# Altium PCB radxa_nx5_io_board_v1.4.PcbDoc (part 6 of 6)
Units mil, origin at the board's own origin, x right, y up, seen from the top; angles counter-clockwise.
Board outline 3937.73 x 3112.19 mil, 6 copper layers (Top, GND02, 内层3, Power4, 内层 5, Bottom), stack 58.1 mil thick; 363 components, 344 nets, 1618 pads, 1594 vias.
Unrouted connection lines stored in the file: 899.
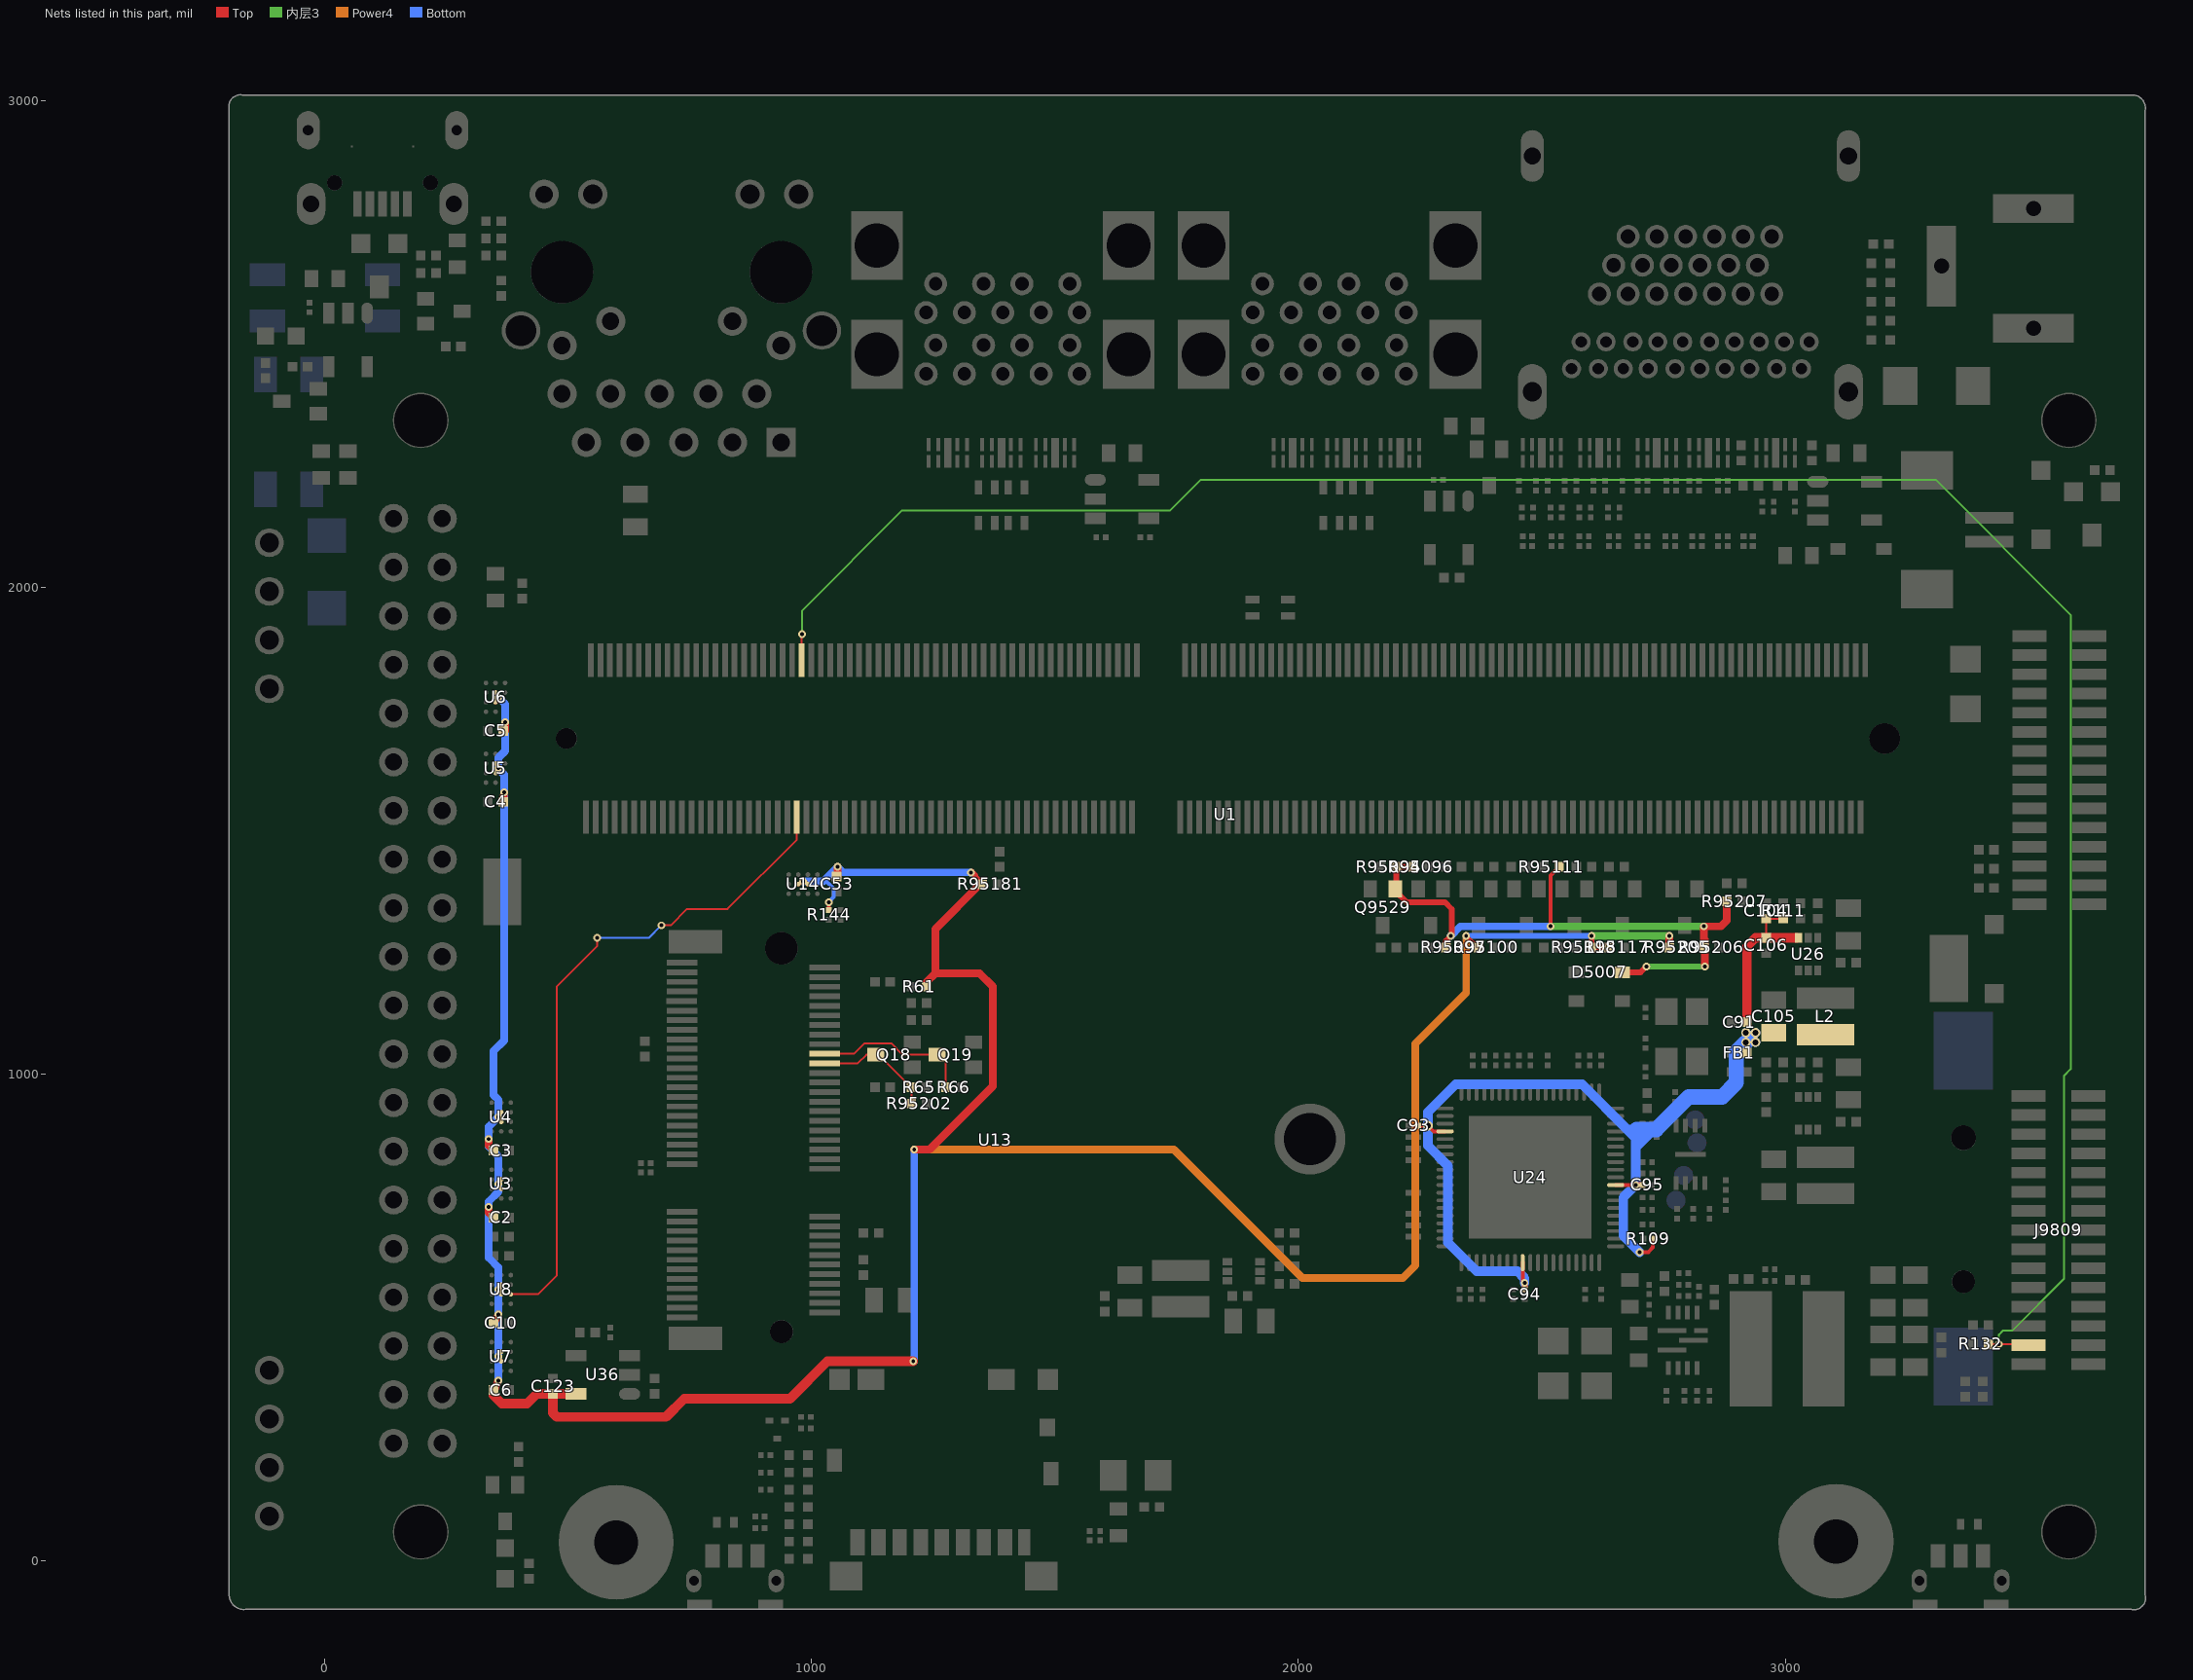
[diagram p9: the nets of this part, all layers, seen from the top]

## Via types
v1: diameter 15.75, hole 7.87, Top to Bottom, 1425 vias
v2: diameter 19.68, hole 11.81, Top to Bottom, 169 vias

## Nets (pads, with @x,y where several pads share a name; then routed paths per layer and width w, separated by ;. In a path a pad name is that pad's centre, name@x,y a point inside that pad or via, vN(x,y) a via of type N, cw(c..) or ccw(c..) an arc to the next point about the centre after c; other vN are vias at no path point) (continued)
VCC_1V2: C91.1 C93.1 C94.1 C95.1 C104.1 C105.1 C106.1 FB1.1 L2.2 R109.1 R111.1 U24.4 U24.28 U24.47 U26.6 | length 2460.5
  Top w3.94: C106.1@2960.63,1279.53 C104.1@2960.63,1318.9 R111.1@2996.06,1318.9
  Top w7.87: C93.1@2246.06,893.7 v2(2265.75,893.7) 2277.56,881.89 U24.4@2301.18,881.89 ; U24.28@2460.63,612.2 2460.63,574.8 v1(2464.57,570.87) ; U24.47@2651.57,771.65 v1(2692.91,771.65) ; v1(2700.79,633.86) 2718.5,633.86 2728.35,643.7 R109.1@2728.35,661.42 ; U26.6@3023.62,1279.53 U26.6@3027.56,1279.53
  Top w11.81: C94.1@2464.57,557.09 v1(2464.57,570.87) ; v1(2692.91,771.65) C95.1@2706.69,771.65
  Top w19.68: C91.1@2921.26,1106.3 2921.26,1261.81 2938.98,1279.53 C106.1@2960.63,1279.53 U26.6@3023.62,1279.53
  Bottom w19.68: v1(2464.57,570.87) 2464.57,580.17 2450.25,594.49 2366.14,594.49 2307.09,653.54 2307.09,811.02 2265.75,852.36 v2(2265.75,893.7) 2265.75,921.26 2322.83,978.35 2582.68,978.35 ; v1(2700.79,633.86) 2667.32,667.32 2667.32,746.06 v1(2692.91,771.65) 2692.91,868.11 ; 2730.32,885.83 2692.91,848.43 2692.91,868.11 ; v2(2919.29,1064.96) v2(2938.98,1084.65) ; v2(2919.29,1084.65) v2(2938.98,1064.96) ; 2582.68,978.35 2675.2,885.83 ; 2582.68,978.35 2692.91,868.11 ; 2675.2,885.83 2692.91,868.11 ; 2675.2,885.83 2694.88,885.83 2692.91,883.86 2692.91,868.11
  Bottom w31.5: 2694.88,885.83 2730.32,885.83 2734.76,885.83 2801.69,952.76 2870.5,952.76 2899.61,981.86 2899.61,1045.28 v2(2919.29,1064.96)
VCC_1V8: C2.2 C3.2 C4.2 C5.2 C6.2 C10.2 C53.2 C123.1 R61.2 R144.2 R95100.2 R95117.2 R95118.2 R95181.2 R95205.2 U3.B2 U3.C2 U4.B2 U4.C2 U5.B2 U5.C2 U6.B2 U6.C2 U7.B2 U7.C2 U8.B2 U8.C2 U14.B2 U14.C2 U36.5 | length 6949.2
  Top w7.87: U5.C2@350.39,1618.11 v1(356.3,1627.95) 356.52,1628.17 356.52,1631.67 U5.B2@350.39,1637.8 ; U6.C2@350.39,1763.78 v1(356.3,1773.62) 356.52,1773.84 356.52,1777.34 U6.B2@350.39,1783.46 ; U7.C2@362.2,409.45 v1(356.3,419.29) 356.08,419.51 356.08,423.01 U7.B2@362.2,429.13 ; U8.C2@362.2,547.24 356.08,553.37 356.08,556.87 v1(356.3,557.09) U8.B2@362.2,566.93 ; U3.C2@362.2,763.78 356.08,769.9 356.08,773.4 v1(356.3,773.62) U3.B2@362.2,783.46 ; U4.C2@362.2,901.57 356.08,907.7 356.08,911.2 v1(356.3,911.42) U4.B2@362.2,921.26 ; U14.B2@972.44,1389.76 v1(982.28,1395.67) 982.5,1395.89 986,1395.89 U14.C2@992.13,1389.76 ; R144.2@1035.43,1336.61 v1(1035.43,1352.36) ; v1(2344.49,1283.46) 2364.17,1265.75 2370.08,1265.75 R95100.2@2370.08,1259.84
  Top w11.81: v1(1326.77,1413.39) 1328.74,1415.35 1336.52,1407.58 1336.38,1407.44 1336.38,1403.78 R95181.2@1350.39,1389.76 ; v1(2602.36,1283.46) R95118.2@2602.36,1259.84 R95117.2@2637.8,1259.84
  Top w15.75: v1(336.61,726.38) 336.61,714.57 C2.2@346.46,704.72 ; v1(336.61,866.14) 336.61,852.36 C3.2@346.46,842.52 ; C6.2@346.46,350.39 347.55,350.39 355.32,367.86 355.32,369.09 v1(356.3,370.08) ; C10.2@346.46,488.19 347.44,488.19 v1(356.3,505.91) ; C4.2@366.14,1559.06 v1(368.11,1578.74) ; C5.2@366.14,1704.72 370.08,1704.72 v1(370.08,1722.44) ; C53.2@1051.18,1405.51 1053.15,1405.51 v1(1053.15,1425.2) ; v1(1210.63,844.49) 1242.13,844.49 1372.05,974.41 1372.05,1082.68 1372.05,1179.41 1344.77,1206.69 1253.94,1206.69 ; R61.2@1236.22,1179.13 1236.22,1188.98 1253.94,1206.69 ; R95181.2@1350.39,1389.76 1346.18,1389.76 1253.94,1297.52 1253.94,1206.69 ; R95205.2@2761.81,1259.84 v1(2761.81,1283.46)
  Top w19.68: C6.2@346.46,350.39 346.46,339.36 362.98,322.83 415.35,322.83 435.04,342.52 C123.1@468.5,342.52 ; U36.5@515.74,342.52 C123.1@468.5,342.52 ; v1(1208.66,409.45) 1032.37,409.45 955.6,332.68 738.19,332.68 700.79,295.28 476.38,295.28 468.5,303.15 C123.1@468.5,342.52
  内层3 w15.75: v1(2602.36,1283.46) v1(2761.81,1283.46)
  Power4 w15.75: v1(1210.63,844.49) 1744.09,844.49 2007.87,580.71 2214.57,580.71 2240.16,606.3 2240.16,1062.15 2344.49,1166.48 v1(2344.49,1283.46)
  Bottom w7.87: 1023.62,1395.67 1030.15,1395.67 1045.28,1380.54 1045.28,1363.16 1034.96,1352.84 v1(1035.43,1352.36)
  Bottom w11.81: v1(2344.49,1283.46) v1(2602.36,1283.46)
  Bottom w15.75: v1(356.3,370.08) v1(356.3,419.29) v1(356.3,505.91) v1(356.3,557.09) 356.3,602.36 336.61,622.05 v1(336.61,726.38) 336.61,737.91 356.3,757.59 v1(356.3,773.62) 356.3,830.71 336.61,850.39 v1(336.61,866.14) 336.61,891.73 v1(356.3,911.42) 356.3,946.85 346.46,956.69 346.46,1046.96 368.11,1068.62 v1(368.11,1578.74) 368.11,1614.45 356.3,1626.26 v1(356.3,1627.95) 356.3,1649.61 370.08,1663.39 v1(370.08,1722.44) 370.08,1759.84 v1(356.3,1773.62) ; v1(982.28,1395.67) 1023.62,1395.67 v1(1053.15,1425.2) 1064.29,1414.06 1326.1,1414.06 v1(1326.77,1413.39) ; v1(1208.66,409.45) 1210.63,409.45 v1(1210.63,844.49)
VDD_3V3_HDMI: D5007.1 Q9529.1 R95094.1 R95096.1 R95097.1 R95111.1 R95206.2 R95207.1 | length 1326
  Top w7.87: v1(2517.72,1303.15) 2517.72,1407.48 R95111.1@2535.43,1425.2
  Top w11.81: R95096.1@2236.22,1425.2 R95094.1@2200.79,1425.2 2200.79,1379.92 Q9529.1@2198.82,1379.92 2198.82,1375.98 2222.44,1352.36 2301.18,1352.36 2314.96,1338.58 2314.96,1285.43 v1(2312.99,1283.46) 2303.15,1273.62 R95097.1@2303.15,1259.84 ; D5007.1@2665.35,1208.66 2702.76,1208.66 v1(2714.57,1220.47)
  Top w15.75: R95206.2@2832.68,1259.84 2832.68,1277.56 ; v1(2834.65,1220.47) 2834.65,1275.59 2832.68,1277.56 ; R95207.1@2879.92,1354.33 2879.92,1314.96 2868.11,1303.15 v1(2832.68,1303.15) 2832.68,1277.56
  内层3 w11.81: v1(2714.57,1220.47) v1(2834.65,1220.47)
  内层3 w15.75: v1(2517.72,1303.15) v1(2832.68,1303.15)
  Bottom w15.75: v1(2312.99,1283.46) 2332.68,1303.15 v1(2517.72,1303.15)
W-DISABLE1: Q19.3 R66.1 U13.56 | length 327.8
  Top w3.94: U13.56@1026.58,1041.34 1086.62,1041.34 1108.27,1062.99 1163.39,1062.99 1187.01,1039.37 Q19.3@1257.87,1039.37 1263.78,1039.37 1275.59,1027.56 R66.1@1275.59,972.44
W-DISABLE2: Q18.3 R65.1 R95202.1 U13.54 | length 246.7
  Top w3.94: U13.54@1026.58,1021.65 1094.49,1021.65 1112.2,1039.37 Q18.3@1131.89,1039.37 1137.8,1039.37 R65.1@1204.72,972.44 R95202.1@1204.72,938.98
WIFI_REG_ON_H: J9809.2 R132.1 U1.215 | length 4589.8
  Top w3.94: U1.215@979.33,1850.39 979.33,1902.56 v1(980.32,1903.54) ; R132.1@3417.32,444.88 v1(3438.98,444.88) 3500,444.88 J9809.2@3500,442.91
  内层3 w3.94: v1(980.32,1903.54) 980.32,1951.88 1185.91,2157.48 1736.22,2157.48 1799.21,2220.47 3309.06,2220.47 3586.61,1942.91 3586.61,1009.84 3572.83,996.06 3572.83,578.74 3466.54,472.44 3446.85,472.44 3438.98,464.57 v1(3438.98,444.88)
WIFI_WAKE_HOST_H: U1.216 U8.C3 | length 1378.8
  Top w3.94: U8.C3@381.89,547.24 437.63,547.24 476.38,586 476.38,1179.68 559.06,1262.36 v1(559.06,1279.53) ; v1(690.94,1305.12) 710.63,1305.12 744.09,1338.58 827.14,1338.58 969.49,1480.93 U1.216@969.49,1527.56
  Bottom w3.94: v1(559.06,1279.53) 665.35,1279.53 v1(690.94,1305.12)
pads on no net: J2.3 J2.4 J4.21 J4.22 J6.D14 J6.H14 J9803.4 J9803.10 J9803.11 J9803.12 J9803.13 J9809.16 J9809.17 J9809.18 J9809.19 J9809.20 J9809.21 J9809.22 J9809.23 J9809.24 J9809.25 J9809.26 J9809.27 J9809.28 J9809.29 J9809.30 J9810.16 J9810.17 J9810.18 J9810.19 J9810.20 J9810.21 J9810.22 J9810.23 J9810.24 J9810.25 J9810.26 J9810.27 J9810.28 J9810.29 J9810.30 SW9208.6 SW9208.7 SW9209.6 SW9209.7 TP85.1 TP87.1 TP88.1 TP90.1 TP92.1 TP93.1 U1.3 U1.5 U1.9 U1.11 U1.15 U1.17 U1.21 U1.23 U1.27 U1.29 U1.33 U1.35 U1.40 U1.42 U1.46 U1.48 U1.51 U1.52 U1.53 U1.54 U1.57 U1.58 U1.59 U1.60 U1.64 U1.66 U1.70 U1.72 U1.76 U1.78 U1.82 U1.84 U1.122 U1.137 U1.139 U1.140 U1.142 U1.148 U1.149 U1.150 U1.151 U1.154 U1.155 U1.156 U1.157 U1.173 U1.175 U1.232 U1.233 U1.234 U1.H1 U1.H2 U6.C1 U13.6 U13.9 U13.11 U13.13 U13.15 U13.16 U13.17 U13.19 U13.21 U13.23 U13.38 U13.40 U13.42 U13.44 U13.46 U13.48 U13.59 U13.61 U13.64 U13.65 U13.66 U13.67 U13.68 U13.71 U13.73 U13.78 U13.79 U13.80 U14.D1 U14.D3 U24.1 U24.2 U24.3 U24.29 U24.30 U24.31 U24.32 U24.33 U24.34 U24.35 U24.36 U24.39 U24.42 U24.74 U24.75 U24.76 U41.3 U41.4 U41.7 U90086.4

## Polygon pours and split planes (outlines as drawn)
GND on Bottom (solid, remove dead copper, pour order 0): -196.85,2982.28 -196.73,2982.28 -196.73,-66.81 -196.72,-66.75 -196.89,-68.85 -196.91,-70.96 -196.78,-73.06 -196.5,-75.15 -196.08,-77.21 -195.52,-79.24 -194.82,-81.22 -193.98,-83.16 -193,-85.02 -191.9,-86.82 -190.68,-88.53 -189.34,-90.16 -187.89,-91.69 -186.34,-93.11 -184.69,-94.42 -182.96,-95.61 -181.14,-96.68 -179.26,-97.62 -177.31,-98.43 -175.32,-99.09 -173.28,-99.62 -171.21,-100 -169.12,-100.24 -167.01,-100.33 -164.91,-100.28 -163.44,-100.15 3710.38,-100.15 3712.04,-100.49 3713.72,-100.72 3715.4,-100.83 3717.1,-100.82 3718.78,-100.69 3720.46,-100.45 3722.11,-100.09 3723.73,-99.61 3725.32,-99.02 3726.86,-98.33 3728.35,-97.53 3729.78,-96.62 3731.14,-95.62 3732.43,-94.53 3733.64,-93.35 3734.77,-92.08 3735.8,-90.75 3736.74,-89.34 3737.58,-87.87 3738.31,-86.35 3738.94,-84.77 3739.45,-83.16 3739.85,-81.52 3740.14,-79.85 3740.3,-78.17 3740.35,-76.48 3740.29,-74.79 3740.1,-73.11 3739.8,-71.44 3739.68,-70.91 3739.67,2979.82 3739.66,2979.78 3739.9,2981.64 3740.02,2983.52 3740,2985.4 3739.85,2987.28 3739.58,2989.14 3739.17,2990.98 3738.63,2992.78 3737.97,2994.54 3737.19,2996.26 3736.3,2997.91 3735.29,2999.5 3734.17,3001.01 3732.94,3002.44 3731.62,3003.78 3730.22,3005.03 3728.72,3006.18 3727.15,3007.22 3725.51,3008.14 3723.82,3008.95 3722.07,3009.64 3720.27,3010.21 3718.44,3010.65 3716.58,3010.96 3714.71,3011.14 3712.83,3011.19 3710.95,3011.11 3709.08,3010.89 3708.71,3010.83 -168.31,3010.83 -168.29,3010.82 -169.91,3011.14 -171.56,3011.35 -173.22,3011.44 -174.87,3011.42 -176.53,3011.28 -178.16,3011.03 -179.78,3010.66 -181.37,3010.18 -182.92,3009.59 -184.43,3008.9 -185.88,3008.1 -187.27,3007.2 -188.6,3006.21 -189.86,3005.12 -191.03,3003.95 -192.13,3002.71 -193.13,3001.39 -194.04,3000 -194.85,2998.55 -195.55,2997.05 -196.15,2995.5 -196.64,2993.92 -197.02,2992.3 -197.29,2990.67 -197.44,2989.02 -197.47,2987.36 -197.39,2985.7 -197.19,2984.05 -196.88,2982.42 -196.86,2982.3
GND on Power4 (solid, remove dead copper, pour order 9): 3364.17,584.65 3500,584.65 3511.81,596.46 3511.81,1248.03 3364.17,1248.03
VCC4V0_SYS on Power4 (solid, remove dead copper, pour order 6): 568.9,1893.7 563.98,1893.7 563.98,1571.85 535.43,1543.31 535.43,1398.62 857.28,1398.62 944.88,1486.22 3521.65,1486.22 3521.65,592.52 3500,570.87 3242.13,570.87 3242.13,375.98 3686.02,375.98 3686.02,1886.81 3472.44,2084.65 568.9,2084.65
VCC5V0_SYS on Power4 (solid, remove dead copper, pour order 5): 2824.8,710.63 2824.8,509.84 2484.25,509.84 2484.25,334.65 1629.92,334.65 1629.92,285.43 23.62,285.43 23.62,1395.67 513.78,1395.67 513.78,1547.24 547.24,1582.68 547.24,2098.43 3507.87,2098.43 3507.87,2474.41 3602.25,2474.41 3602.75,2566.93 3165.35,2566.93 3165.35,2287.4 -159.45,2287.4 -159.45,-37.4 -137.8,-59.06 3230.31,-59.06 3230.31,584.65 3344.49,584.65 3358.27,598.43 3358.27,1297.24 3155.51,1297.24 3155.51,840.55 2954.72,840.55 2954.72,710.63
VCC3V3_WF on Power4 (solid, remove dead copper, pour order 4): 1145.67,1216.54 1074.8,1216.54 1066.93,1208.66 1066.93,521.65 1070.87,517.72 1192.91,517.72 1196.85,521.65 1196.85,1165.35
VCC3V3_SYS on Power4 (solid, remove dead copper, pour order 2): 2720.47,1468.5 2720.47,1114.17 2314.96,1114.17 2253.94,1053.15 2253.94,602.36 2218.5,566.93 2001.97,566.93 1738.19,830.71 1202.76,830.71 1202.76,511.81 352.36,511.81 352.36,1389.76 31.5,1389.76 31.5,291.34 1624.02,291.34 1624.02,340.55 2478.35,340.55 2478.35,515.75 2818.9,515.75 2818.9,716.54 2948.82,716.54 2948.82,846.46 3149.61,846.46 3149.61,1301.18 3492.13,1301.18 3492.13,1468.5
GND on Power4 (solid, remove dead copper, pour order 1): -259.84,3055.12 -259.84,-169.29 3822.83,-169.29 3822.83,3055.12
GND on 内层 5 (solid, remove dead copper, pour order 3): -224.41,3066.93 -224.41,-129.92 3779.53,-129.92 3779.53,3066.93
GND on GND02 (solid, remove dead copper, pour order 7): -196.85,2982.28 -196.73,2982.28 -196.73,-66.81 -196.72,-66.75 -196.89,-68.85 -196.91,-70.96 -196.78,-73.06 -196.5,-75.15 -196.08,-77.21 -195.52,-79.24 -194.82,-81.22 -193.98,-83.16 -193,-85.02 -191.9,-86.82 -190.68,-88.53 -189.34,-90.16 -187.89,-91.69 -186.34,-93.11 -184.69,-94.42 -182.96,-95.61 -181.14,-96.68 -179.26,-97.62 -177.31,-98.43 -175.32,-99.09 -173.28,-99.62 -171.21,-100 -169.12,-100.24 -167.01,-100.33 -164.91,-100.28 -163.44,-100.15 3710.38,-100.15 3712.04,-100.49 3713.72,-100.72 3715.4,-100.83 3717.1,-100.82 3718.78,-100.69 3720.46,-100.45 3722.11,-100.09 3723.73,-99.61 3725.32,-99.02 3726.86,-98.33 3728.35,-97.53 3729.78,-96.62 3731.14,-95.62 3732.43,-94.53 3733.64,-93.35 3734.77,-92.08 3735.8,-90.75 3736.74,-89.34 3737.58,-87.87 3738.31,-86.35 3738.94,-84.77 3739.45,-83.16 3739.85,-81.52 3740.14,-79.85 3740.3,-78.17 3740.35,-76.48 3740.29,-74.79 3740.1,-73.11 3739.8,-71.44 3739.68,-70.91 3739.67,2979.82 3739.66,2979.78 3739.9,2981.64 3740.02,2983.52 3740,2985.4 3739.85,2987.28 3739.58,2989.14 3739.17,2990.98 3738.63,2992.78 3737.97,2994.54 3737.19,2996.26 3736.3,2997.91 3735.29,2999.5 3734.17,3001.01 3732.94,3002.44 3731.62,3003.78 3730.22,3005.03 3728.72,3006.18 3727.15,3007.22 3725.51,3008.14 3723.82,3008.95 3722.07,3009.64 3720.27,3010.21 3718.44,3010.65 3716.58,3010.96 3714.71,3011.14 3712.83,3011.19 3710.95,3011.11 3709.08,3010.89 3708.71,3010.83 -168.31,3010.83 -168.29,3010.82 -169.91,3011.14 -171.56,3011.35 -173.22,3011.44 -174.87,3011.42 -176.53,3011.28 -178.16,3011.03 -179.78,3010.66 -181.37,3010.18 -182.92,3009.59 -184.43,3008.9 -185.88,3008.1 -187.27,3007.2 -188.6,3006.21 -189.86,3005.12 -191.03,3003.95 -192.13,3002.71 -193.13,3001.39 -194.04,3000 -194.85,2998.55 -195.55,2997.05 -196.15,2995.5 -196.64,2993.92 -197.02,2992.3 -197.29,2990.67 -197.44,2989.02 -197.47,2987.36 -197.39,2985.7 -197.19,2984.05 -196.88,2982.42 -196.86,2982.3
GND on 内层3 (solid, remove dead copper, pour order 8): -210.63,3037.4 -210.63,-139.76 3765.75,-139.76 3765.75,3037.4
GND on Top (solid, remove dead copper, pour order 10): -196.85,2982.28 -196.73,2982.28 -196.73,-66.81 -196.72,-66.75 -196.89,-68.85 -196.91,-70.96 -196.78,-73.06 -196.5,-75.15 -196.08,-77.21 -195.52,-79.24 -194.82,-81.22 -193.98,-83.16 -193,-85.02 -191.9,-86.82 -190.68,-88.53 -189.34,-90.16 -187.89,-91.69 -186.34,-93.11 -184.69,-94.42 -182.96,-95.61 -181.14,-96.68 -179.26,-97.62 -177.31,-98.43 -175.32,-99.09 -173.28,-99.62 -171.21,-100 -169.12,-100.24 -167.01,-100.33 -164.91,-100.28 -163.44,-100.15 3710.38,-100.15 3712.04,-100.49 3713.72,-100.72 3715.4,-100.83 3717.1,-100.82 3718.78,-100.69 3720.46,-100.45 3722.11,-100.09 3723.73,-99.61 3725.32,-99.02 3726.86,-98.33 3728.35,-97.53 3729.78,-96.62 3731.14,-95.62 3732.43,-94.53 3733.64,-93.35 3734.77,-92.08 3735.8,-90.75 3736.74,-89.34 3737.58,-87.87 3738.31,-86.35 3738.94,-84.77 3739.45,-83.16 3739.85,-81.52 3740.14,-79.85 3740.3,-78.17 3740.35,-76.48 3740.29,-74.79 3740.1,-73.11 3739.8,-71.44 3739.68,-70.91 3739.67,2979.82 3739.66,2979.78 3739.9,2981.64 3740.02,2983.52 3740,2985.4 3739.85,2987.28 3739.58,2989.14 3739.17,2990.98 3738.63,2992.78 3737.97,2994.54 3737.19,2996.26 3736.3,2997.91 3735.29,2999.5 3734.17,3001.01 3732.94,3002.44 3731.62,3003.78 3730.22,3005.03 3728.72,3006.18 3727.15,3007.22 3725.51,3008.14 3723.82,3008.95 3722.07,3009.64 3720.27,3010.21 3718.44,3010.65 3716.58,3010.96 3714.71,3011.14 3712.83,3011.19 3710.95,3011.11 3709.08,3010.89 3708.71,3010.83 -168.31,3010.83 -168.29,3010.82 -169.91,3011.14 -171.56,3011.35 -173.22,3011.44 -174.87,3011.42 -176.53,3011.28 -178.16,3011.03 -179.78,3010.66 -181.37,3010.18 -182.92,3009.59 -184.43,3008.9 -185.88,3008.1 -187.27,3007.2 -188.6,3006.21 -189.86,3005.12 -191.03,3003.95 -192.13,3002.71 -193.13,3001.39 -194.04,3000 -194.85,2998.55 -195.55,2997.05 -196.15,2995.5 -196.64,2993.92 -197.02,2992.3 -197.29,2990.67 -197.44,2989.02 -197.47,2987.36 -197.39,2985.7 -197.19,2984.05 -196.88,2982.42 -196.86,2982.3

## Keep-outs
Top:
  region: 2578.74,2555.12 2484.25,2555.12 2437.01,2507.87 2437.01,2342.52 2505.91,2273.62 2952.76,2273.62 2952.76,2433.07 3000,2433.07 3000,2533.46 2578.74,2533.46 2578.74,2555.12
  region: 1047.24,1610.24 1324.8,1610.24 1324.8,1555.12 1047.24,1555.12 1047.24,1610.24
  region: 1258.86,2417.32 1258.86,2148.62 1354.33,2053.15 1354.33,2005.91 1413.39,2005.91 1413.39,1978.35 1584.65,1978.35 1584.65,2068.9 1547.24,2068.9 1547.24,2417.32 1258.86,2417.32
  region: 1137.8,1490.16 1137.8,1458.66 1139.76,1458.66 1139.76,1490.16 1137.8,1490.16
  region: 2625.98,2311.02 2625.98,2301.18 2631.89,2301.18 2631.89,2311.02 2625.98,2311.02
  region: 1956.69,2419.29 1956.69,2080.71 2222.44,2080.71 2222.44,2419.29 1956.69,2419.29
  region: 2671.26,1917.32 2718.5,1917.32 2718.5,1907.48 2671.26,1907.48 2671.26,1917.32
  region: 2194.88,1627.95 2194.88,1712.6 2185.04,1712.6 2185.04,1627.95 2194.88,1627.95
  region: 2972.44,553.15 3035.43,553.15 3035.43,316.93 2972.44,316.93 2972.44,553.15
  region: 2956.69,2137.8 2895.67,2137.8 2895.67,1990.16 2956.69,1990.16 2956.69,2137.8
  region: 2899.61,1635.83 2944.88,1635.83 2944.88,1602.36 2899.61,1602.36 2899.61,1635.83
  region: 342.52,2230.32 1072.83,2230.32 1072.83,3011.81 342.52,3011.81 342.52,2230.32
Bottom:
  region: 1598.43,2062.99 1726.38,2062.99 1726.38,1938.98 1598.43,1938.98 1598.43,2062.99
  region: 1466.54,1984.25 1606.3,1984.25 1606.3,1946.85 1466.54,1946.85 1466.54,1984.25
  region: 1965.55,2061.02 1965.55,1985.24 1899.61,1919.29 1899.61,1755.91 2170.28,1755.91 2170.28,1955.71 2236.22,2021.65 2236.22,2061.02 1965.55,2061.02
  region: 2527.56,2305.12 2527.56,2263.78 2643.7,2263.78 2643.7,2305.12 2527.56,2305.12
  region: 1911.42,1230.32 2094.49,1230.32 2094.49,1096.46 1911.42,1096.46 1911.42,1230.32
Keep-Out Layer:
  lines w3.94: 2771.65,2856.3 2838.58,2856.3 ; -196.86,2982.3 cw(c-173.71,2987.69) -168.29,3010.82 3708.66,3010.83 cw(c3713.07,2984.23) 3739.67,2979.82 3739.67,-70.87 cw(c3716.12,-76.61) 3710.38,-100.15 -163.39,-100.15 cw(c-166.75,-70.17) -196.73,-66.81 -196.73,2982.28 -196.85,2982.28

## Other copper
Top:
  region net VCC5V0_SYS: 1765.75,2240.16 1761.81,2244.09 1673.23,2244.09 1669.29,2240.16 1669.29,2204.72 1673.23,2200.79 1761.81,2200.79 1765.75,2204.72 1765.75,2240.16
  region net VCC5V0_SYS: 3594.49,2562.99 3326.77,2562.99 3312.99,2549.21 3312.99,2336.61 3472.44,2336.61 3472.44,2381.89 3594.49,2503.94 3594.49,2562.99
  region net VCC5V0_SYS: 3188.98,960.63 3185.04,964.57 3080.71,964.57 3080.71,911.42 3066.93,897.64 3061.02,897.64 3061.02,875.98 3114.17,875.98 3127.95,889.76 3127.95,917.32 3135.83,925.2 3181.1,925.2 3188.98,933.07 3188.98,960.63
  region net N17064593: 3368.11,2061.02 3659.45,2061.02 3659.45,2133.86 3507.87,2133.86 3486.22,2112.2 3368.11,2112.2 3368.11,2061.02
  region net N16942624: 3041.34,895.67 3041.34,874.02 3023.62,856.3 3023.62,807.09 3141.73,807.09 3141.73,860.24 3133.86,868.11 3057.09,868.11 3053.15,872.05 3053.15,895.67 3041.34,895.67
  region net USB5V_CON1: 1561.02,2228.35 1561.02,2212.6 1564.96,2208.66 1616.14,2208.66 1629.92,2222.44 1629.92,2330.71 1625.98,2334.65 1590.55,2334.65 1582.68,2326.77 1582.68,2250 1561.02,2228.35
  region net VCC3V3_WF: 1590.55,460.63 1706.69,460.63 1706.69,537.4 1625.98,537.4 1612.2,523.62 1590.55,523.62 1590.55,460.63
  region net VCC5V0_SYS: 210.63,2161.42 210.63,2013.78 216.54,2007.87 366.14,2007.87 370.08,2011.81 370.08,2043.31 271.65,2141.73 271.65,2165.35 263.78,2173.23 222.44,2173.23 210.63,2161.42
  region net VCC3V3_SYS: 2927.17,775.59 2927.17,732.28 3141.73,732.28 3141.73,775.59 2927.17,775.59
  region net VCC5V0_SYS: 3370.08,2129.92 3474.41,2129.92 3500,2155.51 3545.28,2155.51 3545.28,2259.84 3450.79,2259.84 3370.08,2179.13 3370.08,2129.92
  region net N16950595: 3041.34,1222.44 3041.34,1200.79 3023.62,1183.07 3023.62,1133.86 3141.73,1133.86 3141.73,1187.01 3133.86,1194.88 3057.09,1194.88 3053.15,1198.82 3053.15,1222.44 3041.34,1222.44
  region net VCC4V0_SYS: 3358.27,539.37 3137.8,539.37 3123.03,554.13 3035.43,554.13 3035.43,316.93 3124.02,316.93 3124.02,415.35 3153.54,444.88 3340.55,444.88 3366.14,470.47 3366.14,531.5 3358.27,539.37
  region net VBUS: 88.58,2877.95 88.58,2826.77 179.13,2826.77 179.13,2877.95 88.58,2877.95
  region net VCC3V3_WF: 994.09,535.43 994.09,492.13 998.03,488.19 1149.61,488.19 1165.35,503.94 1165.35,610.24 1161.42,614.17 1129.92,614.17 1122.05,606.3 1122.05,602.36 1118.11,598.43 1074.8,598.43 1070.87,594.49 1070.87,539.37 1066.93,535.43 994.09,535.43
  region net N8208306: 2866.14,1055.12 2860.24,1049.21 2860.24,982.28 2864.17,978.35 2897.64,978.35 2901.57,982.28 2901.57,1051.18 2897.64,1055.12 2866.14,1055.12
  region net VCC4V0_SYS: 629.92,1883.86 541.34,1883.86 541.34,1789.37 555.12,1775.59 625.98,1775.59 629.92,1779.53 629.92,1883.86
  region net VCC3V3_SYS: 3466.54,1360.24 3466.54,1299.21 3470.47,1295.28 3517.72,1295.28 3537.4,1314.96 3537.4,1360.24 3466.54,1360.24
  region net N17064628: 3559.06,2240.16 3612.2,2240.16 3612.2,2175.2 3559.06,2175.2 3559.06,2240.16
  region net N17079172: 2781.5,444.88 2807.09,444.88 2879.92,372.05 2895.67,372.05 2895.67,498.03 2882.87,498.03 2844.49,459.65 2781.5,459.65 2781.5,444.88
  region net N17064628: 3336.61,1824.8 3401.57,1824.8 3421.26,1844.49 3421.26,1933.07 3419.29,1935.04 3336.61,1935.04 3336.61,1824.8
  region net VCC5V0_SYS: 1700.79,92.52 1840.55,92.52 1840.55,405.51 1882.87,447.83 1882.87,517.72 1875.49,525.1 1875.49,580.71 1844.49,580.71 1844.49,466.54 1803.15,432.09 1803.15,324.8 1743.6,258.37 1685.04,258.37 1685.04,143.7 1700.79,127.95 1700.79,92.52
  region net VCC4V0_SYS: 529.53,1562.99 529.53,1452.76 533.46,1448.82 590.55,1448.82 620.08,1478.35 620.08,1562.99 529.53,1562.99
  region net VCC3V3_SYS: -31.5,2240.16 -31.5,2127.95 27.56,2068.9 78.74,2068.9 108.27,2098.43 165.35,2098.43 181.1,2114.17 181.1,2163.39 104.33,2240.16 -31.5,2240.16
  region net VCC_1V2: 2909.45,1122.05 2909.45,1035.43 2913.39,1031.5 2933.07,1031.5 2958.66,1057.09 3141.73,1057.09 3141.73,1108.27 2944.88,1108.27 2931.1,1122.05 2909.45,1122.05
  region net VCC5V0_SYS: 2480.32,501.97 2734.88,501.97 2747.68,484.25 2799.21,484.25 2799.21,466.54 2761.81,466.54 2748.03,452.76 2724.41,452.76 2716.54,444.88 2671.26,444.88 2646.65,399.61 2480.32,399.61 2480.32,501.97
  region net USB5V-CON2: 2303.15,2385.83 2299.21,2381.89 2299.21,2253.94 2332.68,2238.76 2332.68,2381.89 2328.74,2385.83 2303.15,2385.83
  region net VCC5V0_SYS: 2379.92,2131.89 2336.61,2131.89 2332.68,2127.95 2332.68,2074.8 2336.61,2070.87 2375.98,2070.87 2379.92,2074.8 2379.92,2131.89
  region net VCC3V3_WF: 1076.77,1177.17 1141.73,1177.17 1141.73,1206.69 1124.02,1224.41 994.09,1224.41 994.09,1192.91 1061.02,1192.91 1076.77,1177.17
  region net VCC5V0_SYS: 3188.98,1287.4 3185.04,1291.34 3080.71,1291.34 3080.71,1238.19 3066.93,1224.41 3061.02,1224.41 3061.02,1202.76 3114.17,1202.76 3127.95,1216.54 3127.95,1244.09 3135.83,1251.97 3181.1,1251.97 3188.98,1259.84 3188.98,1287.4
  region net GND: 350.39,2620.08 389.76,2620.08 389.76,2657.48 350.39,2657.48 350.39,2620.08
GND02:
  region net USB5V-CON2: 2295.28,2334.65 2291.34,2338.58 2291.34,2405.51 2295.28,2409.45 2326.77,2409.45 2330.71,2405.51 2330.71,2338.58 2326.77,2334.65 2295.28,2334.65
  region net USB5V_CON1: 1594.49,2334.65 1590.55,2330.71 1590.55,2297.24 1594.49,2293.31 1625.98,2293.31 1629.92,2297.24 1629.92,2330.71 1625.98,2334.65 1594.49,2334.65
内层3:
  region net VCC3V3_SYS: 1248.03,82.68 1287.4,82.68 1287.4,57.09 1248.03,57.09 1248.03,82.68
Power4:
  region net USB5V_CON1: 1594.49,2334.65 1590.55,2330.71 1590.55,2297.24 1594.49,2293.31 1625.98,2293.31 1629.92,2297.24 1629.92,2330.71 1625.98,2334.65 1594.49,2334.65
  region net N31443: 3.94,2535.43 3.94,2494.09 43.31,2494.09 43.31,2535.43 3.94,2535.43
  region net USB5V-CON2: 2295.28,2385.83 2291.34,2381.89 2291.34,2348.43 2295.28,2344.49 2326.77,2344.49 2330.71,2348.43 2330.71,2381.89 2326.77,2385.83 2295.28,2385.83
  region net VCC4V0_SYS: 553.15,1775.59 600.39,1775.59 600.39,1809.06 553.15,1809.06 553.15,1775.59
  region net N31463: 133.86,2598.43 173.23,2598.43 173.23,2633.86 133.86,2633.86 133.86,2598.43
Bottom:
  region net N31463: 163.39,2580.71 163.39,2665.35 80.71,2665.35 80.71,2580.71 163.39,2580.71
  region net N17031706: -61.02,2582.68 -147.64,2582.68 -155.51,2574.8 -155.51,2523.62 -74.8,2523.62 -55.12,2543.31 -55.12,2576.77 -61.02,2582.68
  region net N17031686: -134.84,2021.65 -146.65,2009.84 -146.65,1969.49 -137.8,1960.63 -84.65,1960.63 -45.28,1921.26 43.31,1921.26 43.31,2005.91 27.56,2021.65 -134.84,2021.65
  region net VCC4V0_SYS: 535.43,1456.69 584.65,1456.69 584.65,1564.96 575.79,1573.82 575.79,1714.57 580.22,1719 580.22,1771.65 604.33,1771.65 604.33,1811.02 535.43,1811.02 535.43,1456.69
  region net VCC3V3_WF: 1070.87,576.77 1070.87,478.35 1120.08,478.35 1120.08,576.77 1070.87,576.77
  region net N17031706: -3.94,2236.22 -64.96,2236.22 -74.8,2226.38 -74.8,2155.51 -100.39,2129.92 -131.89,2129.92 -145.67,2116.14 -145.67,2068.9 -135.83,2059.06 41.34,2059.06 47.24,2064.96 47.24,2159.45 -3.94,2210.63 -3.94,2236.22
  region net N31443: 9.84,2533.46 0,2523.62 0,2480.32 -5.91,2474.41 -53.15,2474.41 -53.15,2397.64 19.69,2397.64 43.31,2421.26 43.31,2523.62 33.46,2533.46 9.84,2533.46
  region net VCC3V3_WF: 1590.55,488.19 1590.55,446.85 1659.45,446.85 1659.45,488.19 1590.55,488.19
  region net N17031686: -155.51,2665.35 -155.51,2606.3 -147.64,2598.43 -92.52,2598.43 -80.71,2610.24 -80.71,2665.35 -155.51,2665.35
  region net N31433: -17.72,2535.43 -53.15,2535.43 -70.87,2517.72 -133.86,2517.72 -145.67,2505.91 -145.67,2401.57 -98.43,2401.57 -98.43,2444.88 -62.99,2480.32 -23.62,2480.32 -11.81,2492.13 -11.81,2529.53 -17.72,2535.43
  region net N17031686: -139.76,2279.53 -145.67,2273.62 -145.67,2165.35 -94.49,2165.35 -94.49,2269.69 -104.33,2279.53 -139.76,2279.53

## Silkscreen, mask and mechanical layers (free items; w line width, h text height)
Silkscreen Top:
  text "OTG" at -167.32,2688.98 h35.43
  text "FAN" at 3381.89,2251.97 h35.43
  text "+" at 3204.72,2248.03 h31.5
  text "-" at 3204.72,1986.22 h31.5
  text "USB3.0" at 2059.06,1960.63 h35.43
  text "Ethernet" at 629.92,1956.69 h35.43
  text "USB3.0" at 1293.31,1956.69 h35.43
  text "HDMI+DP" at 2706.69,1956.69 h35.43
  text "CAM0" at 3438.98,1551.18 h35.43 r90
  text "U13-H" at 1974.41,856.3 h19.68
  text "KEY E" at 1645.67,820.87 h35.43
  text "CAM1" at 3440.94,655.51 h35.43 r90
  text "TF CARD" at 1547.24,291.34 h35.43
  text "Markrom" at 641.73,165.35 h35.43
  text "POWER" at 3257.87,112.2 h35.43
Silkscreen Bottom:
  drawing of 22808 lines, arcs and shapes, not listed
  text "ONLY 5V" at 3377.95,2933.07 h36.56 r180
  text "3V3" at 54.17,2251.97 h28.12 r180
  text "2" at 340.2,2232.48 h22.5 r180
  text "1" at 24.13,2231.93 h22.5 r180
  text "5V" at 366.85,2162.99 h28.12 r180
  text "5V" at 366.85,2060.83 h28.12 r180
  text "GND" at 359.96,1960.43 h28.12 r180
  text "D2-SDA" at -46.95,1913.39 h23.62 r180
  text "D3-SCL" at -43.97,1870.08 h23.62 r180
  text "D14(TXD)" at 329.17,1856.42 h28.12 r180
  text "V1.4" at 1799.21,1842.52 h25.31 r180
  text "2023.10.20" at 2092.52,1842.52 h24.61 r180
  text "D4" at 3.03,1822.83 h28.12 r180
  text "MODEL:NX5 IO Board" at 1799.21,1793.31 h29.53 r180
  text "GND" at -8.51,1760.43 h28.12 r180
  text "D15(RXD)" at 327.7,1756.02 h28.12 r180
  text "D17" at 0.92,1660.04 h28.12 r180
  text "D18" at 369.38,1660.04 h28.12 r180
  text "D27" at -7.03,1560.63 h28.12 r180
  text "GND" at 359.96,1560.63 h28.12 r180
  text "D22" at -7.03,1462.2 h28.12 r180
  text "D23" at 361.43,1462.2 h28.12 r180
  text "3V3" at -12.77,1362.8 h28.12 r180
  text "D24" at 360.76,1362.8 h28.12 r180
  text "D10" at 3.79,1260.43 h28.12 r180
  text "GND" at 359.96,1260.43 h28.12 r180
  text "D9" at 6.14,1162.01 h28.12 r180
  text "D25" at 361.43,1162.01 h28.12 r180
  text "D11" at 12.68,1061.61 h28.12 r180
  text "D8" at 373.93,1061.61 h28.12 r180
  text "GND" at -8.51,961.22 h28.12 r180
  text "D7" at 373.93,961.22 h28.12 r180
  text "D0(ID_SD)" at -169.01,858.86 h25.31 r180
  text "D1(ID_SC)" at 332.43,854.92 h28.12 r180
  text "D5" at 5.47,762.4 h28.12 r180
  text "GND" at 359.96,762.4 h28.12 r180
  text "D6" at 6.14,662.99 h28.12 r180
  text "D12" at 369.38,662.99 h28.12 r180
  text "D13" at 0.92,561.61 h28.12 r180
  text "GND" at 362.36,561.61 h28.12 r180
  text "D19" at 1.59,463.19 h28.12 r180
  text "D16" at 372.45,463.19 h28.12 r180
  text "D26" at -6.36,360.83 h28.12 r180
  text "D20" at 366.7,360.83 h28.12 r180
  text "GND" at -8.51,260.43 h28.12 r180
  text "D21" at 375.6,260.43 h28.12 r180
  text "39" at 0,191.89 h22.5 r180
  text "40" at 335.51,173.82 h22.5 r180
  text "-" at 1811.42,101.42 h42.18 r270
Layer_18:
  drawing of 648 lines, arcs and shapes, not listed
  text "Board Thickness:1.20 mm+/-10%" at 7687.72,3999.04 h35.71
  text "Board Name:Radxa_Zero_2_V1.2" at 5175.71,3966.5 h35.71
  text "Panel Mode:" at 7675.71,3866.5 h35.71
  text "Edadoc Code:1106920" at 5169.41,3866.1 h35.71
  text "Layers:8" at 6124.73,3865.19 h35.71
  text "1x4" at 8182.01,3860.59 h35.71
  text "Silkscreen Color:" at 5170.99,3723.98 h35.71
  text "White" at 6232.41,3710.99 h35.72
  text "Yellow" at 7013.9,3710.99 h35.71
  text "Black" at 7807.21,3710.99 h35.71
  text "XXXXX" at 8594.61,3703.11 h35.71
  text "Soldermask Color:" at 5170.99,3586.18 h35.71
  text "XXXXX" at 8594.61,3585 h35.71
  text "Green" at 6232.41,3574.76 h35.71
  text "Blue" at 7025.32,3574.76 h35.71
  text "Red" at 7801.3,3574.76 h35.71
  text "HASL(Sn/Pb)" at 6228.86,3438.54 h35.71
  text "Immersion Gold(ENIG)" at 7800.12,3438.54 h35.71
  text "HASL(Pb-Free)" at 7019.02,3435 h35.71
  text "OSP" at 6235.95,3302.32 h35.71
  text "ImAg" at 7013.51,3301.54 h35.71
  text "imSN" at 7796.97,3297.6 h35.72
  text "XXXXX" at 8589.1,3293.66 h35.71
  text "Surface Finished" at 5163.9,3250.36 h35.71
  text "Golden Finger,Others HASL(Pb-Free)" at 6249.73,3167.68 h35.71
  text "Golden Finger,Others ENIG" at 7808.78,3159.8 h35.71
  text "Golden Finger,Others HASL(Sn/Pb)" at 6249.73,3029.88 h35.71
  text "Golden Finger,Others OSP" at 7808.78,3022.01 h35.71
  text "Other" at 7014.69,2881.06 h35.71
  text "Dielectric Material:" at 5170.99,2879.49 h35.71
  text "FR-4" at 6237.92,2879.49 h35.71
  text "Default" at 6245.79,2750.36 h35.71
  text "Mid-Tg" at 7027.68,2749.57 h35.71
  text "Hi-Tg" at 7815.08,2749.57 h35.71
  text "XXXXX" at 8589.1,2742.48 h35.71
  text "150" at 7304.85,2739.33 h35.71
  text "170" at 8048.94,2737.76 h35.71
  text "C" at 7447.76,2736.97 h35.71
  text "C" at 8191.86,2735.39 h35.71
  text "Tg:" at 5174.14,2677.52 h35.71
  text "If the number of layer  10, TG must be  170" at 6114.49,2605.34 h35.71
  text "C" at 7937.14,2605.02 h35.71
  text "Compare With IPC File:" at 5169.02,2482.64 h35.71
  text "Yes" at 6249.73,2473.58 h35.71
  text "No" at 7017.45,2469.65 h35.71
  text "xxxxx" at 6778.47,2333.82 h35.71
  text "Short Net Name:" at 6125.32,2332.25 h35.71
  text "[XX]" at 5787.13,2281.85 h35.71
  text "Short Net NO." at 5169.41,2273.98 h35.71
  text "Layer Stack up" at 5921.5,1770.67 h21.43
  text "Type" at 7229.38,1766.2 h21.43
  text "Thickness (mil)" at 7962.25,1758.33 h21.43
  text "Silk Top" at 6038.04,1667.52 h21.43
  text "Default" at 7973.28,1600.85 h21.43
  text "Solder Top" at 5997.49,1565.15 h21.43
  text "1.2(0.5oz+plating)" at 7924.65,1473.42 h21.43
  text "Top01" at 5248.67,1456.89 h21.43
  text "3.04" at 7964.81,1367.91 h21.43
  text "PREPREG" at 6743.16,1364.63 h21.43
  text "PREPREG" at 5248.67,1359.64 h21.43
  text "GND02" at 5241.98,1270.66 h21.43
  text "1.2(1.0oz)" at 7964.81,1269.48 h21.43
  text "4.30" at 7964.81,1171.06 h21.43
  text "CORE" at 6745.91,1167.78 h21.43
  text "CORE" at 5253.79,1163.97 h21.43
  text "1.2(1.0oz)" at 7964.81,1072.63 h21.43
  text "ART03" at 5251.03,1072.24 h21.43
  text "10.0" at 7964.81,974.21 h21.43
  text "PREPREG" at 6743.16,970.92 h21.43
  text "PREPREG" at 5245.52,967.12 h21.43
  text "ART04" at 5251.03,875.39 h21.43
  text "1.2(1.0oz)" at 7964.81,875.78 h21.43
  text "4.30" at 7964.81,777.36 h21.43
  text "CORE" at 6745.91,774.08 h21.43
  text "CORE" at 5253.79,770.27 h21.43
  text "POWR05" at 5251.03,678.54 h21.43
  text "1.2(1.0oz)" at 7964.81,678.93 h21.43
  text "10.0" at 7964.81,580.51 h21.43
  text "PREPREG" at 6743.16,577.22 h21.43
  text "PREPREG" at 5245.52,573.42 h21.43
  text "ART06" at 5251.03,481.69 h21.43
  text "1.2(1.0oz)" at 7964.81,482.08 h21.43
  text "4.30" at 7964.81,383.66 h21.43
  text "CORE" at 6745.91,380.37 h21.43
  text "CORE" at 5253.79,376.57 h21.43
  text "GND07" at 5251.03,284.84 h21.43
  text "1.2(1.0oz)" at 7964.81,285.23 h21.43
  text "3.04" at 7964.81,186.81 h21.43
  text "PREPREG" at 6743.16,183.52 h21.43
  text "PREPREG" at 5245.52,179.72 h21.43
  text "1.2(0.5oz+plating)" at 7924.65,89.56 h21.43
  text "Bot08" at 5248.28,82.48 h21.43
  text "Solder Bot" at 5997.49,-7.29 h21.43
  text "Default" at 7971.11,-51.78 h21.43
  text "Silk Bot" at 6038.04,-101.78 h21.43
  text "Ref.Layers" at 8268.23,-615.8 h35.71
  text "Tolerance" at 7110.67,-626.2 h35.71
  text "Design Layer" at 5863.9,-627.22 h35.71
  text "Trace Width" at 6534.57,-627.22 h35.71
  text "Frequency" at 7600.32,-627.22 h35.71
  text "Single Impedance" at 5147.3,-628.79 h35.71
  text "(ohm)" at 5342.05,-705.96 h35.71
  text "(mil)" at 6641.26,-705.96 h35.71
  text "(MHZ)" at 7664.89,-705.96 h35.71
  text "(OHM)" at 7192.45,-709.89 h35.71
  text "50 ohm" at 5356.99,-816.58 h35.71
  text "4.0" at 6723.3,-817.93 h35.71
  text "5" at 7295.56,-823.85 h35.71
  text "Default" at 7617.17,-824.62 h35.71
  text "1,8" at 6035.69,-825.8 h35.71
  text "3,6" at 6033.64,-919.37 h35.71
  text "4.2" at 6726.55,-919.37 h35.71
  text "Default" at 7618.63,-925.51 h35.71
  text "50 ohm" at 5356.99,-926.82 h35.71
  text "5" at 7295.56,-930.15 h35.71
  text "1" at 6028.64,-1014.37 h35.71
  text "15.01" at 6721.55,-1014.37 h35.71
  text "L3" at 8380.32,-1020.98 h35.71
  text "50 ohm" at 5351.99,-1021.82 h35.71
  text "5" at 7295.56,-1024.64 h35.71
  text "Default" at 7615.32,-1025.98 h35.71
  text "Design Layer" at 5856.03,-1835.88 h35.71
  text "Trace W/S" at 6549.14,-1835.88 h35.71
  text "Frequency" at 7612.13,-1835.88 h35.71
  text "Ref.Layers" at 8291.86,-1838.89 h35.71
  text "Tolerance" at 7102.8,-1842.73 h35.71
  text "Diff Impedance" at 5181.37,-1846.11 h35.71
  text "(ohm)" at 5314.49,-1914.62 h35.71
  text "(mil)" at 6618.63,-1917.63 h35.71
  text "(MHZ)" at 7661.93,-1917.63 h35.71
  text "(%)" at 7234.57,-1922.49 h35.71
  text "+" at 7231.93,-2014.09 h35.71
  text "10" at 7271.93,-2034.09 h35.71
  text "Default" at 7617.17,-2034.86 h35.71
  text "100 ohm" at 5359.64,-2037.06 h35.71
  text "1,8" at 5994.27,-2041.42 h35.71
  text "4.01/7.0" at 6605.36,-2042.34 h35.71
  text "-" at 7231.93,-2044.09 h35.71
  text "+" at 7231.93,-2114.09 h35.71
  text "10" at 7271.93,-2134.09 h35.71
  text "Default" at 7617.17,-2134.86 h35.71
  text "3,6" at 6002.14,-2143.78 h35.71
  text "3.9/8.1" at 6605.36,-2144.7 h35.71
  text "-" at 7231.93,-2144.09 h35.71
  text "100 ohm" at 5367.52,-2147.29 h35.71
  text "+" at 7231.93,-2214.09 h35.71
  text "10" at 7271.93,-2234.09 h35.71
  text "Default" at 7617.17,-2234.86 h35.71
  text "90 ohm" at 5364.86,-2241.78 h35.71
  text "-" at 7231.93,-2244.09 h35.71
  text "1,8" at 6002.14,-2246.15 h35.71
  text "4.8/6.7" at 6608.44,-2246.15 h35.71
  text "+" at 7236.93,-2314.09 h35.71
  text "10" at 7276.93,-2334.09 h35.71
  text "Default" at 7622.17,-2334.86 h35.71
  text "90 ohm" at 5369.86,-2341.78 h35.71
  text "-" at 7236.93,-2344.09 h35.71
  text "3,6" at 6007.14,-2346.15 h35.71
  text "4.8/8.5" at 6613.44,-2346.15 h35.71